# EAGLE board main (EAGLE 6.5.0)
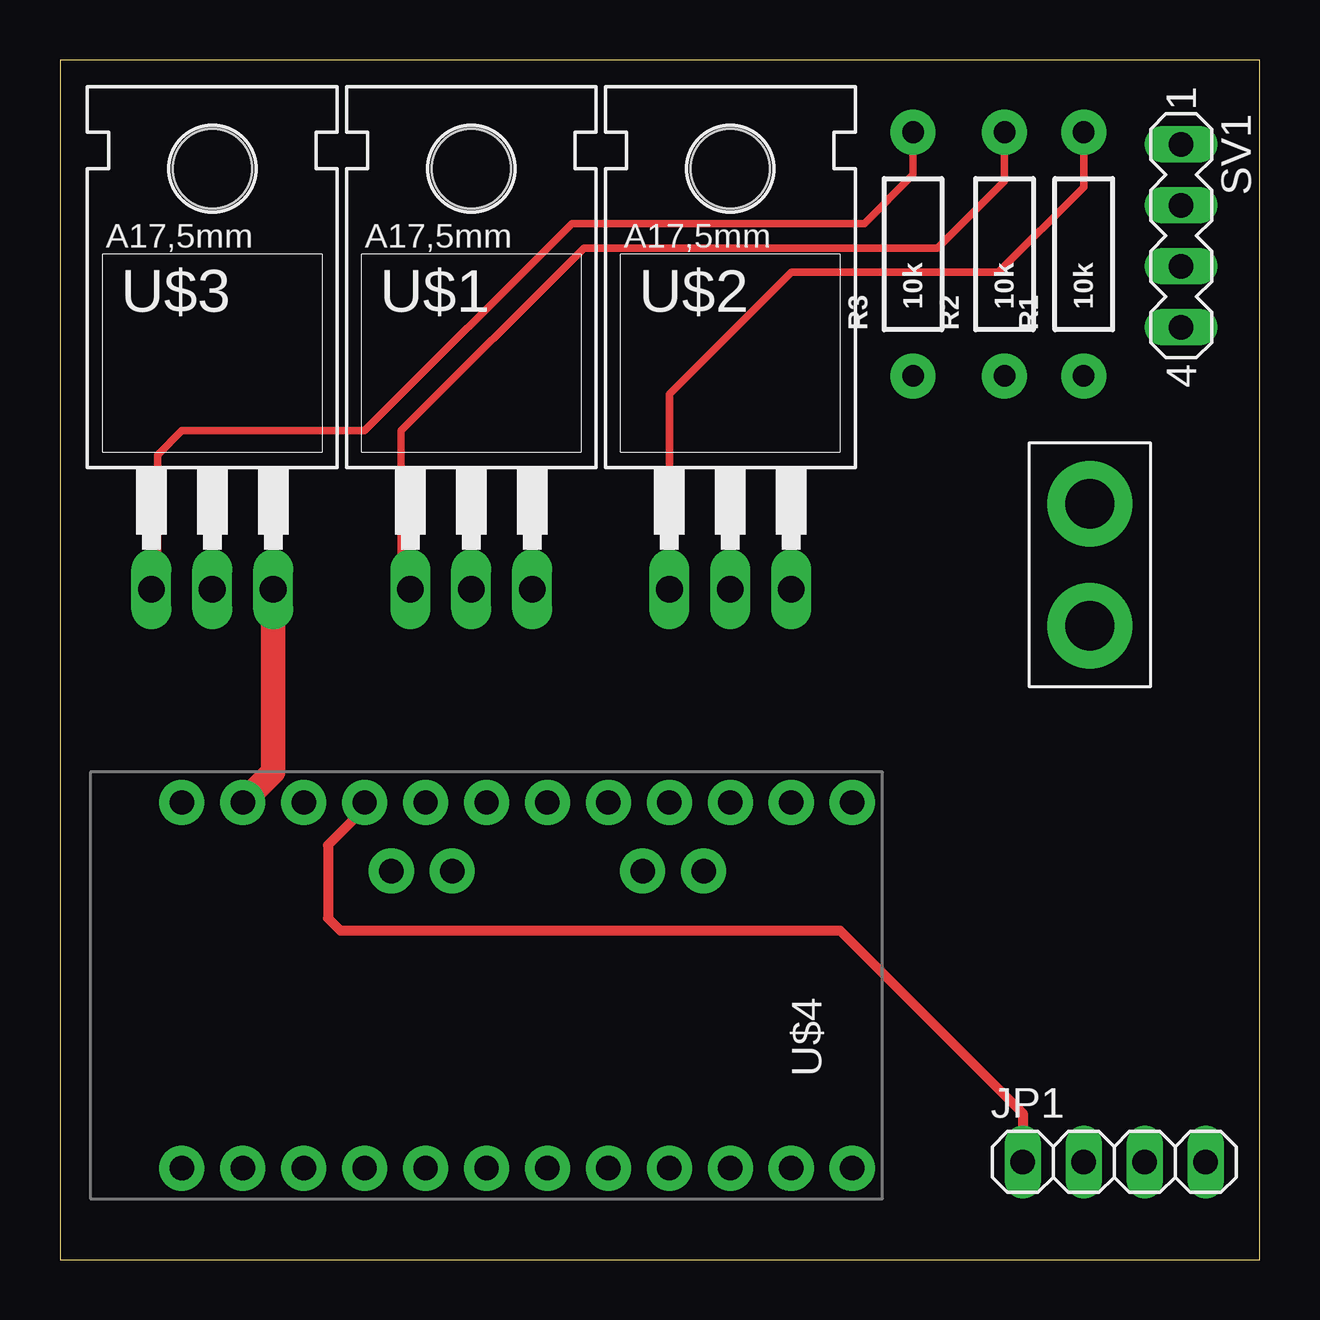
[diagram p0: board, top side]
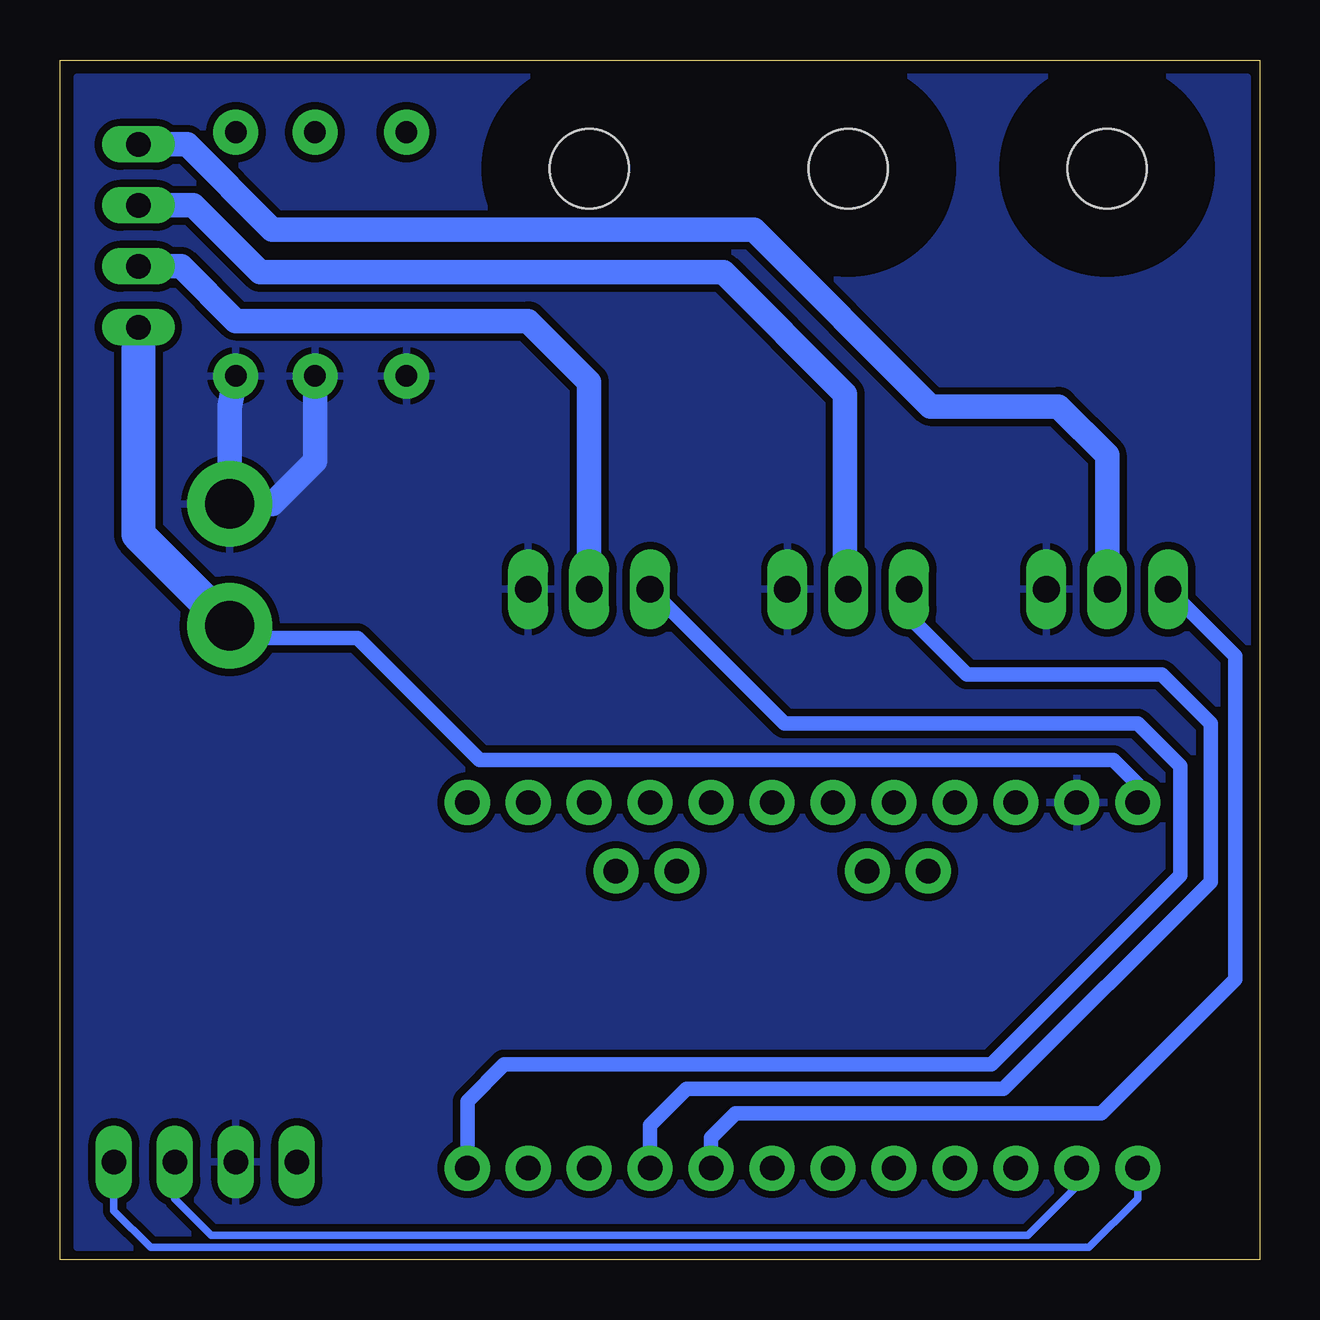
[diagram p1: board, bottom side, seen from below]

Size 50 x 50 mm. Coordinates in mm from the lower left corner, seen from the top.
Outline: 0,0 50,0 50,50 0,50 0,0
Copper layers (1*16): Top 0.035mm / dielectric 1.5mm / Bottom 0.035mm
Design rules "dirt_cheap_dirty_boards.v1": minimum track width 5mil, minimum drill 12mil, track to track 5mil, track to pad 5mil, pad to pad 5mil, via to via 5mil, smd to smd 0mil, copper to edge 10mil, drill to drill 10mil, minimum pad ring 10mil, minimum via ring 6mil, stop-mask expansion 2mil, vias tented up to drill 25mil, thermal gap 10mil

## Footprints (pad centres in the part's own frame; a part is rotated, then mirrored left to right if it is on the bottom)
1X04 = drill 1.016 long: 1 -3.81,0; 2 -1.27,0; 3 1.27,0; 4 3.81,0
1X02_XTRA_BIG = drill 2.057 pad 3.556: 1 -2.54,0; 2 2.54,0
AXIAL-0.4 = drill 0.9 pad 1.88: P$1 -5.08,0; P$2 5.08,0
MA04-1 = drill 1.016 long: 1 -3.81,0; 2 -1.27,0; 3 1.27,0; 4 3.81,0
TO220AH = drill 1.118 long: B -2.54,-6.35; C 0,-6.35; E 2.54,-6.35 | hole 3.302: 0,11.176
ARDUINO_PRO_MINI = drill 1.016 pad 1.88: 1 -7.62,12.7; 2 -7.62,10.16; 3 -7.62,7.62; 4 -7.62,5.08; 5 -7.62,2.54; 6 -7.62,0; 7 -7.62,-2.54; 8 -7.62,-5.08; 9 -7.62,-7.62; 10 -7.62,-10.16; 11 -7.62,-12.7; 12 -7.62,-15.24; 13 7.62,-15.24; 14 7.62,-12.7; 15 7.62,-10.16; 16 7.62,-7.62; 17 7.62,-5.08; 18 7.62,-2.54; 19 7.62,0; 20 7.62,2.54; 21 7.62,5.08; 22 7.62,7.62; 23 7.62,10.16; 24 7.62,12.7; A4 4.763,1.429; A5 4.763,3.969; A6 4.763,-9.049; A7 4.763,-6.509

## Placement (x,y rotation side)
JP1  [1X04]  43.94,4.06 0 top
JP2  M02PTH4  [1X02_XTRA_BIG]  42.93,28.96 90 top
R1  10k  [AXIAL-0.4]  42.67,41.91 90 top
R2  10k  [AXIAL-0.4]  39.37,41.91 90 top
R3  10k  [AXIAL-0.4]  35.56,41.91 90 top
SV1  [MA04-1]  46.74,42.67 270 top
U$1  IRL540  [TO220AH]  17.14,34.29 0 top
U$2  IRL540  [TO220AH]  27.94,34.29 0 top
U$3  IRL540  [TO220AH]  6.35,34.29 0 top
U$4  ARDUINO_PRO_MINI  [ARDUINO_PRO_MINI]  17.78,11.43 90 top

## Library data of the parts
JP1 = pinhead
JP2 = SparkFun-Connectors
R1-R3 = SparkFun-Resistors
SV1 = con-lstb; OC_FARNELL: unknown; OC_NEWARK: unknown
U$1-U$3 = transistor-power
U$4 = SparkFun-Boards

## Nets
GND: JP1.2 JP2.2 R1.P$1 R2.P$1 R3.P$1 U$1.E U$2.E U$3.E U$4.23
N$2: R3.P$2 U$3.B U$4.8
N$3: R2.P$2 U$1.B U$4.9
N$4: R1.P$2 U$2.B U$4.12
N$5: JP2.1 SV1.4 U$4.24
N$6: SV1.1 U$3.C
N$7: U$4.22
N$8: SV1.3 U$2.C
N$9: SV1.2 U$1.C
RX: JP1.4 U$4.1
TX: JP1.3 U$4.2
VCC: JP1.1 U$4.21

## Tracks (layer width: path | path; a pad name or v marks a point on that pad's centre or on a via)
GND
  Top 1.016: U$3.E 8.89,20.32 U$4.23
  Bottom 1.016: R1.P$1 42.93,35.56 JP2.2 41.15,31.5 39.37,33.27 R2.P$1
  pour Bottom (isolate 0.305): 0.51,0.51 0.51,49.28 49.28,49.28 49.28,0.51
N$2
  Top 0.305: R3.P$2 35.56,45.21 33.53,43.18 21.34,43.18 12.7,34.54 5.08,34.54 4.06,33.53 4.06,28.19 U$3.B
  Bottom 0.61: U$4.8 22.86,5.08 21.84,6.1 6.6,6.1 1.02,11.68 1.02,25.15 U$3.B
N$3
  Top 0.305: R2.P$2 39.37,44.96 36.58,42.16 21.84,42.16 14.22,34.54 14.22,28.32 U$1.B
  Bottom 0.61: U$4.9 25.4,5.59 23.88,7.11 10.67,7.11 2.03,15.75 2.03,22.35 4.06,24.38 12.19,24.38 14.61,26.8 U$1.B
N$4
  Top 0.305: R1.P$2 42.67,44.7 39.12,41.15 30.48,41.15 25.4,36.07 U$2.B
  Bottom 0.61: U$4.12 33.02,6.6 31.5,8.13 11.18,8.13 3.3,16 3.3,20.57 5.08,22.35 19.81,22.35 U$2.B
N$5
  Bottom 0.61: U$4.24 5.08,19.81 6.1,20.83 32.51,20.83 37.59,25.91 42.42,25.91 JP2.1
  Bottom 1.422: SV1.4 46.74,30.23 JP2.1
N$6
  Bottom 1.016: SV1.1 44.7,46.48 41.15,42.93 21.08,42.93 13.72,35.56 8.38,35.56 6.35,33.53 U$3.C
N$8
  Bottom 1.016: SV1.3 44.96,41.4 42.67,39.12 30.48,39.12 27.94,36.58 U$2.C
N$9
  Bottom 1.016: SV1.2 44.45,43.94 41.66,41.15 22.35,41.15 17.27,36.07 17.27,28.07 U$1.C
RX
  Bottom 0.305: JP1.4 47.75,2.03 46.23,0.51 7.11,0.51 5.08,2.54 U$4.1
TX
  Bottom 0.305: JP1.3 45.21,2.54 43.69,1.02 9.65,1.02 7.62,3.05 U$4.2
VCC
  Top 0.406: U$4.21 12.7,18.8 11.18,17.27 11.18,14.22 11.68,13.72 32.51,13.72 40.13,6.1 JP1.1